# Altium PCB HV_Board_2022.PcbDoc
Units mil, origin at the board's own origin, x right, y up, seen from the top; angles counter-clockwise.
Board outline 7874.02 x 2952.76 mil, 2 copper layers (Top Layer, Bottom Layer), stack 13.42 mil thick; 32 components, 23 nets, 135 pads, 1 vias.
Unrouted connection lines stored in the file: 20.
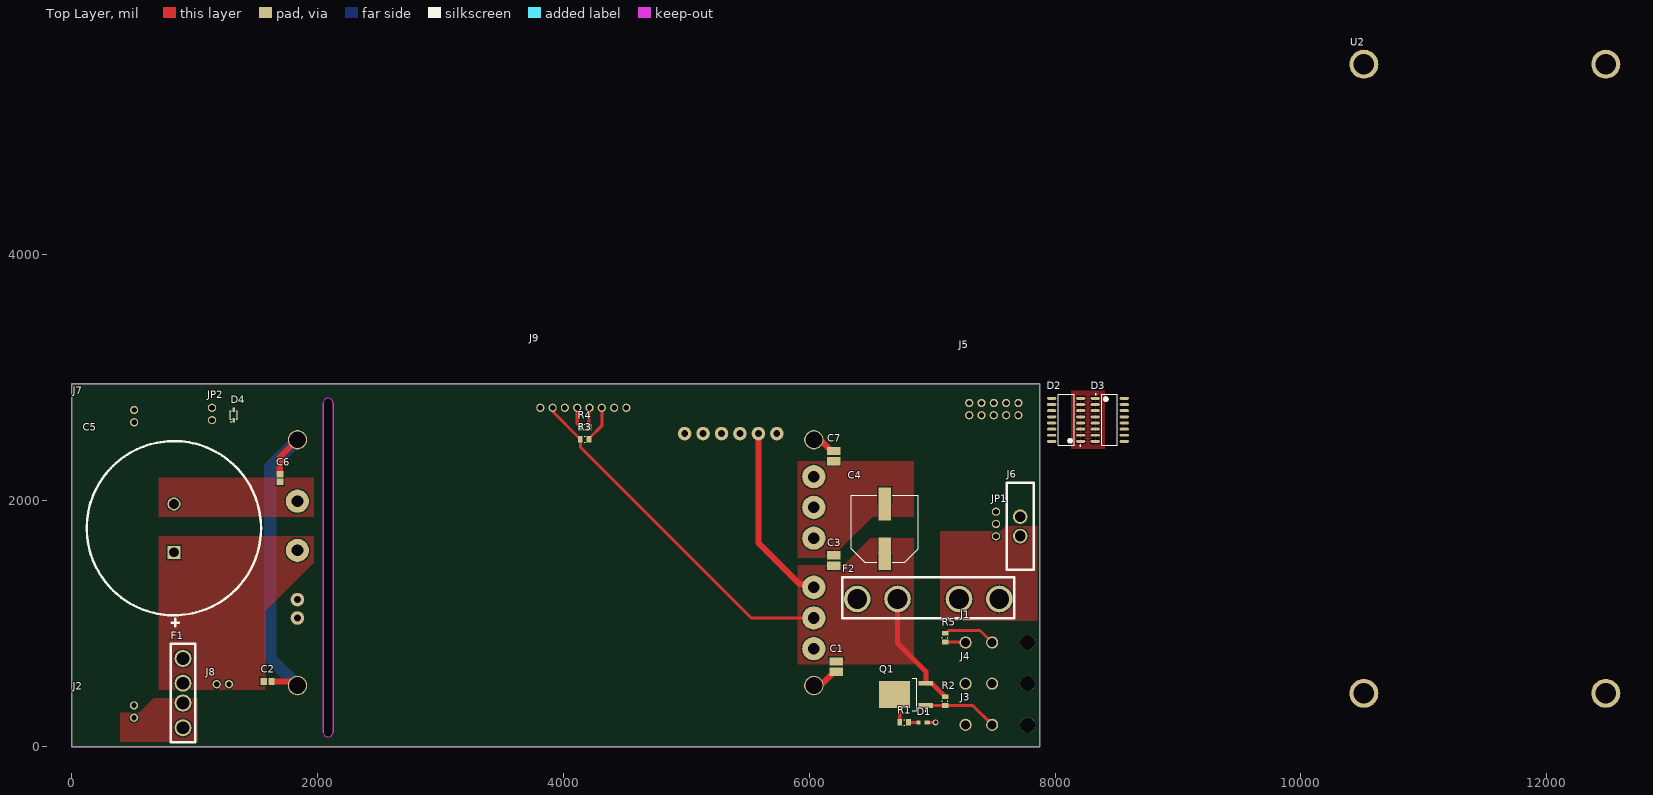
[diagram p0: Top Layer view]
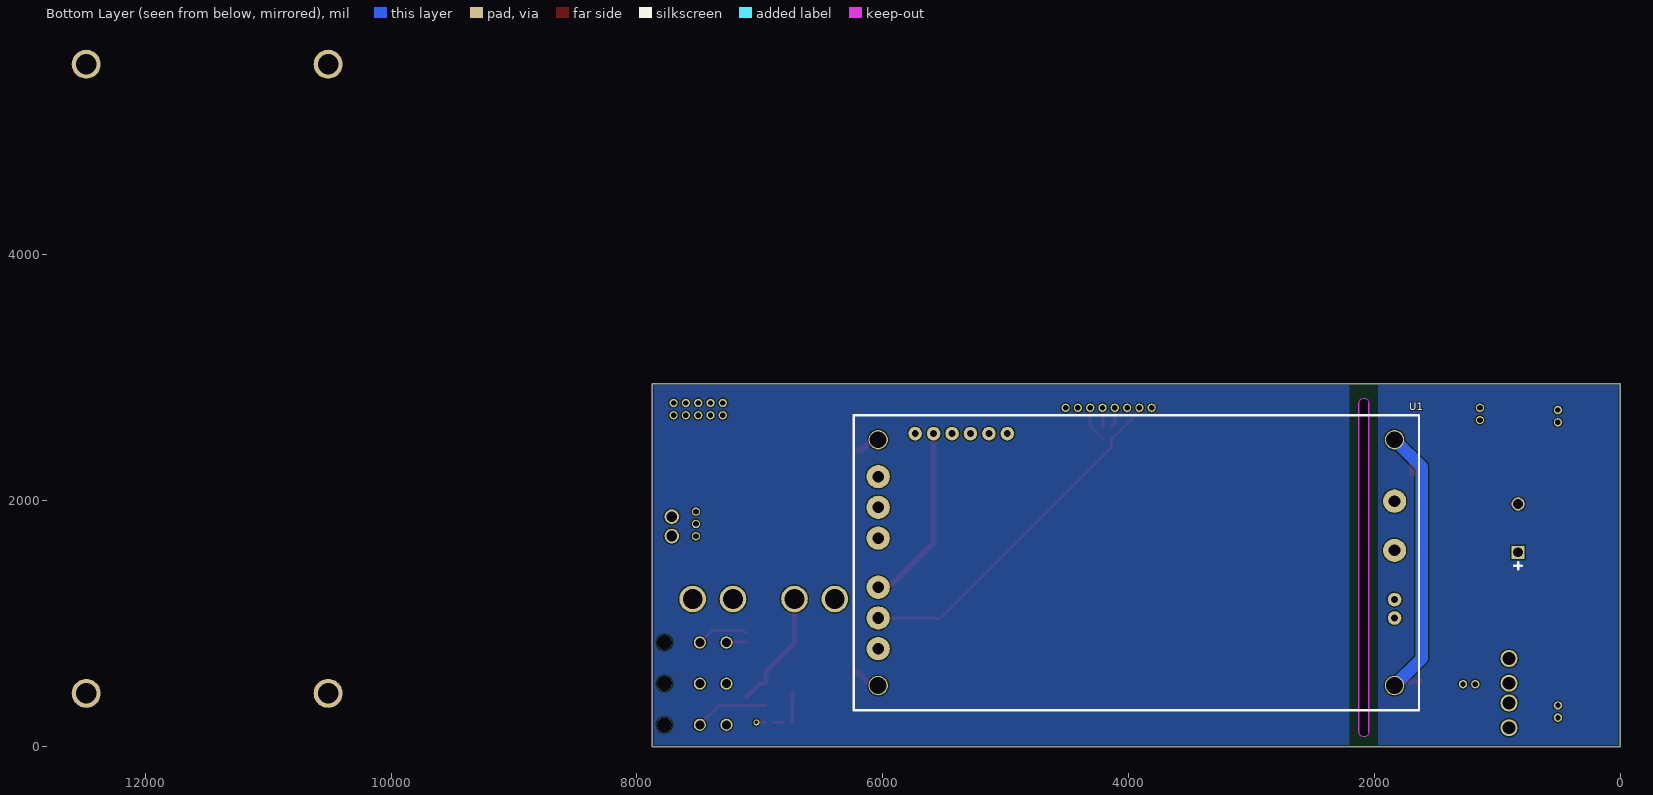
[diagram p1: Bottom Layer view, seen from below]

## Layer stack, top to bottom
Top Solder: solder mask 0.4, Solder Resist, Dk 3.5
Top Layer: signal copper 2
Dielectric 1: core 10, FR-4, Dk 4.2
Bottom Layer: signal copper 1.4201
Bottom Solder: solder mask 0.4, Solder Resist, Dk 3.5

## Board outline
0,0 7874.02,0 7874.02,2952.76 0,2952.76
cut-out: 2047.24,118.11 ccw(c2086.61,118.11) 2125.98,118.11 2125.98,2795.28 ccw(c2086.61,2795.28) 2047.24,2795.28

## Design rules (kind name [scope] priority, off if disabled: settings)
Clearance [All] p1: gap=10 ignorepadtopadclearanceinfootprint=FALSE except(0: Arc-Hole Track-Hole SMDPad-Hole THPad-Hole Via-Hole Fill-Hole Poly-Hole Region-Hole Text-Hole)
PolygonConnect [All] p1: connectstyle=Relief reliefconductorwidth=10 reliefentries=4 polygonreliefangle="90 Angle" airgapwidth=10
RoutingVias [All] p1: holewidth=28 width=50 viastyle="Through Hole" minholewidth=28 minwidth=50 maxholewidth=28 maxwidth=50
SolderMaskExpansion [All] p1: expansion=4 istentingtop=FALSE
Width [All] p1: maxlimit=100 minlimit=10 preferedwidth=10 minimp=50.000000 maximp=50.000000 favimp=50.000000
30 further rules are at their usual default settings.

## Classes and differential pairs
component class IMD: J7 J8 J9 R3 R4 R5 U2
component class Connectors_and_Protection: D1 D2 D3 D4 F1 F2 J1 J2 J3 J4 J5 J6 JP1 JP2 Q1 R1 R2
component class HV_to_LV_Power_Supply: * C1 C2 C3 C4 C5 C6 C7 U1

## Components (designator, comment, footprint, x,y, rotation, side; value= is the part's Value field where it differs from the comment)
C1 "0.22uF-450V" CAPC3025X28N 6220.47,649.61 r90 top
C2 "2200pF" CAP-0805 1594.49,530.67 r180 top
C3 "1uF" CAPC3025X28N 6200.79,1513.62 r270 top
C4 "1mF" CAPAE146136X170M 6614.17,1771.65 r90 top
C5 "330uF 450V" "AEC 380LQ331M450A022" 831.77,1973.5 r270 top
C6 "2200pF" CAP-0805 1692.91,2185.04 r270 top
C7 "0.22uF-450V" CAPC3025X28N 6200.79,2362.2 r270 top
D1 "Green" LED-0603 6968.5,228.35 r180 top
D2 "12V" 16-SO 8090.55,2657.48 r180 top
D3 "3.3V" 16-SO 8444.88,2657.48 r0 top
D4 "5V" DIODE-SOD323 1318.9,2696.85 r90 top
F1 "36-3522-2-ND" "Fuse Holder - 500V - 20A" 905.51,435.04 r90 top
F2 "36-3555-2-ND" "Fuse Holder - 500V - 50A" 6968.5,1200.79 r180 top
J1 "0768250002" 2X1PIN 7271.65,846.46 r90 top
J2 "WM4153-ND" 2PIN 507.44,334.65 r270 top
J3 "0768250002" 2X1PIN 7271.65,177.17 r90 top
J4 "0768250002" 2X1PIN 7271.65,511.81 r90 top
J5 "WM8263-ND" 2X5PIN 7701.57,2795.28 r180 top
J6 "952-2900-ND" 2Pin-POWER 7716.54,1791.34 r90 top
J7 "WM4153-ND" 2PIN 507.7,2737.8 r270 top
J8 "WM4153-ND" 2PIN 1179.53,507.44 r0 top
J9 "23-0705530112-ND" 8PIN 4512.6,2755.91 r180 top
JP1 "732-5316-ND" 3PIN-JP 7519.69,1711.02 r90 top
JP2 "732-5315-ND" 2PIN-JP 1141.73,2755.91 r270 top
Q1 "NTD2955T4GOSCT-ND" DPAK-TO252 6787.4,424.8 r180 top
R1 "2.2K" RES-0805 6771.65,196.85 r0 top
R2 "100K" RES-0805 7106.3,370.08 r270 top
R3 "2.2K" RES-0805 4173.23,2500 r180 top
R4 "2.2K" RES-0805 4173.23,2598.43 r0 top
R5 "2.2K" RES-0805 7106.3,885.83 r90 top
U1 "400V-12V BUCK-62.5A" CFB750-300S12 3937.01,1496.06 r0 bottom
U2 "ir155-3402" "IMD-Bender ir155 3204" 11496.06,2992.13 r90 top

## Footprints (in the part's own frame and the unit in brackets; to place one, negate y for a bottom-side part, rotate by r counter-clockwise, add the part's x,y. Pads: shape width x height; smd on the part's side, far side on the other; paste and mask are expansions set on the pad)
2PIN [mm]
  round 1.7 hole 1.11: 1(0,0) 2(2.54,0)
  body extent -2.48,-12.89 4.88,0.7, height 7.06
2PIN-JP [mm]
  round 1.7 hole 1.15: 1(0,0) 2(2.54,0)
  body extent -1.24,-1.27 3.84,1.27, height 8.57
2Pin-POWER [mm]
  round 3 hole 2.2: 1(-2,0) 2(2,0)
  silkscreen extent -9,-2.8 9,2.8, body extent -9,-3.27 9,2.78, height 5.6
2X1PIN [mm]
  round 2.5 hole 1.85: 1(0,0) 2(0,-5.5)
  round 3.1 hole 3.1: 3(0,-12.8)
  body extent -4.15,-21.4 4.2,0.56, height 14.55
2X5PIN [mm]
  round 1.7 hole 1.11: 1(0,0) 2(2.54,0) 3(5.08,0) 4(7.62,0) 5(10.16,0) 6(10.16,2.54) 7(7.62,2.54) 8(5.08,2.54) 9(2.54,2.54) 10(0,2.54)
  body extent -2.42,-10.55 12.62,2.85, height 9.87
3PIN-JP [mm]
  round 1.7 hole 1.15: 1(0,0) 2(2.54,0) 3(5.08,0)
  body extent -1.31,-1.27 6.31,1.27, height 8.57
8PIN [mm]
  round 1.7 hole 1.11: 1(0,0) 2(2.54,0) 3(5.08,0) 4(7.62,0) 5(10.16,0) 6(12.7,0) 7(15.24,0) 8(17.78,0)
  body extent -2.56,-12.89 20.3,0.7, height 7.06
16-SO [mm]
  oval 1.9x0.6 smd: 1(-3,4.445) 2(-3,3.175) 3(-3,1.905) 4(-3,0.635) 5(-3,-0.635) 6(-3,-1.905) 7(-3,-3.175) 8(-3,-4.445) 9(3,-4.445) 10(3,-3.175) 11(3,-1.905) 12(3,-0.635) 13(3,0.635) 14(3,1.905) 15(3,3.175) 16(3,4.445)
  silkscreen extent -3.03,-5.25 1.6,5.42
"AEC 380LQ331M450A022" [mm]
  rect 2.7x2.7 hole 2: 1(10,0)
  round 2.7 hole 2: 2(0,0)
  silkscreen extent -13,-18 25.25,18, body extent -12.5,-17.5 22.5,17.5, height 30
CAP-0805 [mm] "Chip Capacitor, 2-Leads, Body 2.00x1.25mm, IPC Medium Density"
  rect 1.3x1.45 smd: 1(-0.8,0) 2(0.8,0)
  body extent -1.1,-0.72 1.1,0.72, height 1.35
CAPAE146136X170M [mm] "Aluminum Electrolytic Capacitor, Body 13.60x13.60x17.00mm, IPC Low Density"
  rect 6.75x2.6 smd: 1(-5.125,0) 2(5.125,0)
  silkscreen extent -6.9,-6.9 6.9,6.9, body extent -6.9,-6.9 6.9,6.9, height 17
CAPC3025X28N [mm] "Chip Capacitor, 2-Leads, Body 3.00x2.50mm, IPC Medium Density"
  rect 1.75x2.8 smd: 1(-1.075,0) 2(1.075,0)
  body extent -1.6,-1.4 1.6,1.4, height 2.8
CFB750-300S12 [mm] "Cincon CFB750-300S12 DC-DC Converter"
  round 4.8 hole 2.4: 1(-53.35,-12.7) 2(-53.35,-2.54) 5(53.35,17.78) 6(53.35,11.43) 7(53.35,5.08) 8(53.35,-5.08) 9(53.35,-11.43) 10(53.35,-17.78)
  round 2.8 hole 1.4: 3(-53.35,7.62) 4(-53.35,11.43) 11(45.71,-26.67) 12(41.9,-26.67) 13(38.09,-26.67) 14(34.28,-26.67) 15(30.47,-26.67) 16(26.66,-26.67)
  round 4 hole 3.5: C_HV(-53.35,-25.4) C_HV(-53.35,25.4) C_LV_+12(53.35,25.4) C_LV_GND(53.35,-25.4)
  silkscreen extent -58.4,-30.5 58.4,30.5, body extent -58.4,-30.5 58.4,30.5, height 12.7
DIODE-SOD323 [mm] "SODFL, 2-Leads, Body 1.25x2.50mm, IPC Medium Density"
  rect 0.9x0.5 smd: 1(-1.1,0) 2(1.1,0)
  silkscreen extent -1.5,-0.7 0.9,0.7, body extent -1.25,-0.67 1.25,0.67, height 1.1
DPAK-TO252 [mm] "D-PAK, 3-Pads, Body 6.20x6.73mm (max), IPC Medium Density"
  rect 3x1 smd: 1(-4.1,2.29) 3(-4.1,-2.29)
  rect 6.4x5.55 smd: 2(2.35,0)
  silkscreen extent -4.23,-3.35 -1.25,3.46, body extent -4.57,-3.37 5.33,3.37, height 2.38
"Fuse Holder - 500V - 20A" [mm]
  round 3.5 hole 2.6: 1(-7.15,0) 1(-2.05,0) 2(2.05,0) 2(7.15,0)
  silkscreen extent -10.16,-2.54 10.16,2.54, body extent -9.65,-2.22 9.65,2.22, height 7.62
"Fuse Holder - 500V - 50A" [mm]
  round 5.5 hole 4.05: 1(-14.7,0) 1(-6.35,0) 2(6.35,0) 2(14.7,0)
  silkscreen extent -17.78,-4.5 17.78,4, body extent -17.9,-3.92 17.91,1.92, height 11.22
"IMD-Bender ir155 3204" [mm]
  round 6 hole 4.2: 1(-65,-25) 1(-65,25) 1(65,-25) 1(65,25)
LED-0603 [mm]
  rect 0.8x0.8 smd: 1(2,0.8) 2(0.4,0.8)
  silkscreen extent -0.18,0.43 -0.18,1.17, body extent 0.4,0.4 2,1.2, height 0.7
RES-0805 [mm] "Chip Resistor, 2-Leads, Body 2.00x1.25mm, IPC Medium Density"
  rect 1x1.35 smd: 1(-0.9,0) 2(0.9,0)
  silkscreen extent -0.1,-0.58 0.1,0.58, body extent -1.05,-0.67 1.05,0.67, height 0.6

## Part data
C1 C7: library part 0.22uF-450V-1210, "CAP CER 0.22UF 450V X7T 1210", Capacitance=220nF, Case Code (Imperial)=1210, Case Code (Metric)=3225, Dielectric=X7T, Manufacturer=TDK, Manufacturer Part Number=C3225X7T2W224K200AE, Max Operating Temperature=125°C, Min Operating Temperature=-55°C, Package Quantity=1000, Resistor Type=Ceramic, Supplier Part Number 1=445-8909-1-ND, Tolerance=10%, Voltage Rating=450V, Case/Package=1210, Category="Ceramic Capacitors", ComponentLink1Description=https://datasheet.ciiva.com/24219/c3225x7t2w224k200ae-265393-24219702.pdf?src-supplier=Mouser, ComponentLink1URL=https://datasheet.ciiva.com/24219/c3225x7t2w224k200ae-265393-24219702.pdf?src-supplier=Mouser, Depth=2.5mm, Features="Soft Termination", Height=2mm, Length=3.2mm, Mount="Surface Mount", Packaging="Tape and Reel", Pricing 1="1=0.90000, 10=0.66200, 50=0.52980, 100=0.45410, 500=0.35948 (USD)", RoHS=Yes, RoHS Compliant=Yes, Series=C, Stock 1=22849, Supplier 1=Digi-Key, Termination=SMD/SMT, Thickness=0.098inch, Voltage Rating (DC)=450V, Weight=0.000564oz, Width=2.5mm
C2 C6: library part 2200pF-450V-0805, "Cap Ceramic 0.0022uF 450V C0G 5% Pad SMD 0805 Soft Termination 125C Automotive T/R CGA4F4C0G2W222J085AE", Manufacturer=TDK, Manufacturer Part Number=CGA4F4C0G2W222J085AE, Supplier Part Number 1=445-175690-1-ND, Category="Ceramic Capacitors", Pricing 1="1=0.51000, 10=0.35600, 50=0.24940, 100=0.21380, 500=0.16038, 1000=0.13543 (USD)", RoHS=Yes, RoHS Compliant=Yes, Stock 1=9544, Supplier 1=Digi-Key
C3: library part 1uF-50V-1210, "CAP CER 1UF 50V X7R 1210 CL32B105KBHNNNE", Case Code (Imperial)=1210, Case Code (Metric)=3225, Dielectric=X7R, Manufacturer=Samsung, Manufacturer Part Number=CL32B105KBHNNNE, Max Operating Temperature=125°C, Min Operating Temperature=-55°C, Package Quantity=1, Supplier Part Number 1=1276-1811-1-ND, Tolerance=10%, Voltage=50V, Capacitance=1uF, Case/Package=1210, Category="Ceramic Capacitors", ComponentLink1Description=https://datasheet.ciiva.com/15196/getdatasheetpartid-355242-15196145.pdf?src-supplier=Verical, ComponentLink1URL=https://datasheet.ciiva.com/15196/getdatasheetpartid-355242-15196145.pdf?src-supplier=Verical, ComponentLink2Description=https://datasheet.ciiva.com/29202/451199-da-01-en-vs-kondensator-1210-29202487.pdf?src-supplier=Conrad, ComponentLink2URL=https://datasheet.ciiva.com/29202/451199-da-01-en-vs-kondensator-1210-29202487.pdf?src-supplier=Conrad, ComponentLink3Description=https://datasheet.ciiva.com/16369/cl05b104kq5nnnc-16369702.pdf?src-supplier=Future+Electronics, ComponentLink3URL=https://datasheet.ciiva.com/16369/cl05b104kq5nnnc-16369702.pdf?src-supplier=Future+Electronics, Construction=Flat, Depth=2.5mm, Height=1.6mm, Length=3.2mm, Material=Ceramic, Mount="Surface Mount", Packaging="Tape and Reel", Pricing 1="1=0.26000, 10=0.17800, 50=0.11900, 100=0.10110, 500=0.07134, 1000=0.06243 (USD)", Radiation Hardening=No, RoHS=Yes, RoHS Compliant=Yes, Series=CL, Stock 1=27840, Supplier 1=Digi-Key, Thickness=0.071inch, Voltage Rating=50V, Width=0.098inch
C4: library part AEC-1mF-25V, "CAP ALUM 1000UF 20% 25V SMD UUG1E102MNQ1MS", Case/Package=Radial, Leakage Current=10uA, Manufacturer=Nichicon, Manufacturer Part Number=UUG1E102MNQ1MS, Max Operating Temperature=85°C, Min Operating Temperature=-40°C, Package Quantity=1, Ripple Current=820mA, Supplier Part Number 1=493-7421-1-ND, Tolerance=20%, Voltage Rating=25V, Capacitance=1mF, Category="Aluminum Electrolytic Capacitors", ComponentLink1Description=https://datasheet.ciiva.com/6311/e-ug-6311782.pdf?src-supplier=Digi-Key, ComponentLink1URL=https://datasheet.ciiva.com/6311/e-ug-6311782.pdf?src-supplier=Digi-Key, ComponentLink2Description=https://datasheet.ciiva.com/6311/e-ug-6311783.pdf?src-supplier=Digi-Key, ComponentLink2URL=https://datasheet.ciiva.com/6311/e-ug-6311783.pdf?src-supplier=Digi-Key, Diameter=12.5mm, Dissipation Factor=0.16%, Height=16mm, Height - Seated (Max)=0.669inch, Lead Free="Contains Lead", Length=16mm, Life (Hours)=2000Hour, Mount="Surface Mount", Packaging="Tape and Reel", Pricing 1="1=1.53000, 10=1.20500, 50=1.04480 (USD)", REACH SVHC="No SVHC", Ripple Current (AC)=820mA, RoHS=Yes, RoHS Compliant=Yes, Series=UG, Stock 1=77, Supplier 1=Digi-Key, Termination=SMD/SMT, Voltage Rating (DC)=25V
C5: library part AEC-330uF-450V, "Aluminum Electrolytic Capacitors - Snap In 330uF 450V 20% 380LQ331M450A022", Capacitance=330uF, Case/Package=Radial, Dielectric Material=Aluminium, ESR (Equivalent Series Resistance)=603mR, Manufacturer="Cornell Dubilier", Manufacturer Part Number=380LQ331M450A022, Max Operating Temperature=85°C, Min Operating Temperature=-25°C, Package Quantity=40, Ripple Current=2.01A, Tolerance=20%, Voltage Rating=450V, Category="Aluminum Electrolytic Capacitors", ComponentLink1Description=https://datasheet.ciiva.com/5372/380lq-5372414.pdf?src-supplier=Mouser, ComponentLink1URL=https://datasheet.ciiva.com/5372/380lq-5372414.pdf?src-supplier=Mouser, Diameter=35mm, Features="General Purpose", Height=30mm, Height - Seated (Max)=1.181inch, Lead Free="Lead Free", Lead Pitch=10mm, Length=30mm, Life (Hours)=2000Hour, Mount="Through Hole", Number of Pins=2, Packaging=Bulk, Pricing 1="1=6.30000, 10=5.67000, 50=4.91400, 100=4.28400, 500=3.52800, 1000=3.27600, 2500=3.21300, 5000=3.19200 (USD)", REACH SVHC=Unknown, RoHS=Yes, RoHS Compliant=Yes, Series=380LQ, Stock 1=2991, Supplier 1=Digi-Key, Termination="Snap in", Voltage Rating (DC)=450V, Weight=1.69315oz
D1: library part LED-Green, "LED GREEN CLEAR 0603 SMD", Case Code (Imperial)=0603, Case Code (Metric)=1608, Forward Current=30mA, Forward Voltage=2V, Manufacturer="Wurth Electronics", Manufacturer Part Number=150060VS75000, Max Operating Temperature=85°C, Min Operating Temperature=-40°C, Package Quantity=1, Supplier Part Number 1=732-4980-1-ND, Test Current=20mA, Case/Package=0603, Color=Green, ComponentLink1Description=https://katalog.we-online.de/led/datasheet/150060VS75000.pdf?src-supplier=Digi-Key, ComponentLink1URL=https://katalog.we-online.de/led/datasheet/150060VS75000.pdf?src-supplier=Digi-Key, Dominant Wavelength=570nm, Height=0.7mm, Length=1.6mm, Lens Style=Clear,Rectangular, Luminous Intensity=40mcd, Mount="Surface Mount", Number of Pins=2, Packaging="Tape and Reel", Pricing 1="1=0.14, 50=0.133, 100=0.114, 500=0.099 (USD)", REACH SVHC=Unknown, Stock 1=118118, Supplier 1=Digi-Key, Viewing Angle=140°, Wavelength=570nm, Width=0.8mm
D2: library part TVS-12V-X8, "PD 300W VWM 12VCJ 25PFPACKAGE SO", Supplier Part Number 1=1655-2159-1-ND, Supplier 1=Digi-Key
D3: library part TVS-3.3V-X8, "PD 300W VWM 3.3VCJ 25PFPACKAGE S", Supplier Part Number 1=1655-2157-1-ND, Supplier 1=Digi-Key
D4: library part TVS-5V, "TVS DIODE 5V SOD323", Manufacturer=Nexperia, Manufacturer Part Number=PESD5V0U1UA,115, Supplier Part Number 1=1727-4155-6-ND, ComponentLink1Description=https://assets.nexperia.com/documents/data-sheet/PESD5V0U1UA_UB_UL.pdf?src-supplier=Digi-Key, ComponentLink1URL=https://assets.nexperia.com/documents/data-sheet/PESD5V0U1UA_UB_UL.pdf?src-supplier=Digi-Key, ComponentLink2Description=http://www.farnell.com/datasheets/453996.pdf?src-supplier=Farnell, ComponentLink2URL=http://www.farnell.com/datasheets/453996.pdf?src-supplier=Farnell, Pricing 1="1=0.43, 10=0.32, 25=0.28, 100=0.152, 250=0.1512, 500=0.124, 1000=0.092 (USD)", Stock 1=127058, Supplier 1=Digi-Key
F1: library part "Fuse Holder - 500V - 20A", "FUSE CLIP BLADE 500V 20A PCB", Supplier 1=Digi-Key
F2: library part "Fuse Holder - 500V - 50A", "FUSE BLOCK BLADE 500V 50A PCB", Supplier 1=Digi-Key
J1 J3 J4: library part 2X1PIN, "CONN HEADER R/A 2POS", Color=Black, Manufacturer=Molex, Manufacturer Part Number=76825-0002, Supplier Part Number 1=WM11969-ND, ComponentLink1Description=http://www.farnell.com/datasheets/1968956.pdf?src-supplier=Element14, ComponentLink1URL=http://www.farnell.com/datasheets/1968956.pdf?src-supplier=Element14, ComponentLink2Description=http://www.farnell.com/datasheets/2216551.pdf?src-supplier=Newark, ComponentLink2URL=http://www.farnell.com/datasheets/2216551.pdf?src-supplier=Newark, ComponentLink3Description=http://www.farnell.com/datasheets/2216551.pdf?src-supplier=Farnell, ComponentLink3URL=http://www.farnell.com/datasheets/2216551.pdf?src-supplier=Farnell, ComponentLink4Description=https://www.molex.com/pdm_docs/sd/768250002_sd.pdf?src-supplier=Digi-Key, ComponentLink4URL=https://www.molex.com/pdm_docs/sd/768250002_sd.pdf?src-supplier=Digi-Key, ComponentLink5Description=http://www.farnell.com/datasheets/2001779.pdf?src-supplier=Element14, ComponentLink5URL=http://www.farnell.com/datasheets/2001779.pdf?src-supplier=Element14, ComponentLink6Description=http://www.alliedelec.com/images/products/datasheets/bm/BrandonData/70717238.pdf?src-supplier=Allied+Electronics, ComponentLink6URL=http://www.alliedelec.com/images/products/datasheets/bm/BrandonData/70717238.pdf?src-supplier=Allied+Electronics, Contact Material=Copper, Contact Plating=Tin, Gender=Male, Number of Circuits=2, Number of Contacts=2, Number of Rows=2, Orientation="Right Angle", Pitch=5.7mm, Pricing 1="1=1.13, 10=0.993, 25=0.9344, 50=0.8956, 100=0.8567, 250=0.7788, 500=0.70092, 1000=0.62304, 2500=0.56463 (USD)", REACH SVHC=Unknown, Stock 1=0, Supplier 1=Digi-Key, Termination="Through Hole"
J2 J7 J8: library part 2PIN, "CONN HEADER R/A 2POS 2.54MM", Color=Black, Contact Resistance=30mR, Manufacturer=Molex, Manufacturer Part Number=0705530106, Max Operating Temperature=105°C, Min Operating Temperature=-40°C, ComponentLink1Description=http://www.molex.com/webdocs/datasheets/pdf/en-us/0705530106_PCB_HEADERS.pdf?src-supplier=Avnet+Asia, ComponentLink1URL=http://www.molex.com/webdocs/datasheets/pdf/en-us/0705530106_PCB_HEADERS.pdf?src-supplier=Avnet+Asia, ComponentLink2Description=https://www.molex.com/pdm_docs/ps/PS-70400.pdf?src-supplier=Digi-Key, ComponentLink2URL=https://www.molex.com/pdm_docs/ps/PS-70400.pdf?src-supplier=Digi-Key, Connector Type="Male Pin", Contact Material=Bronze, Contact Mating Length=0.24inch, Contact Plating=Gold, Depth=13.59mm, Housing Color=Black, Housing Material=Polyester, Length=7.37mm, Mount="Through Hole", Number of Contacts=2, Number of Positions=2, Number of Rows=1, Orientation="Right Angle", Packaging=Rail/Tube, Pitch=2.54mm, Pricing 1="1=1.38, 10=1.25, 100=1.071, 500=0.8925, 1000=0.765, 5000=0.6783, 10000=0.663 (USD)", Stock 1=2224, Supplier 1=Digi-Key, Supplier Part Number 1=WM4153-ND, Termination=Solder
J5: library part 2X5PIN, "CONN HEADER R/A 10POS 2.54MM", Color=Black, Current Rating=3A, Flammability Rating="UL94 V-0", Manufacturer=Molex, Manufacturer Part Number=90130-3110, Max Operating Temperature=125°C, Max Voltage Rating (AC)=350V, Max Voltage Rating (DC)=350.35kV, Min Operating Temperature=-55°C, Package Quantity=1, ComponentLink1Description=http://www.mouser.com/ds/2/276/0901303110_PCB_HEADERS-151522.pdf?src-supplier=Mouser, ComponentLink1URL=http://www.mouser.com/ds/2/276/0901303110_PCB_HEADERS-151522.pdf?src-supplier=Mouser, ComponentLink2Description=http://uk.rs-online.com/webdocs/13c4/0900766b813c4c8e.pdf?src-supplier=RSComponents, ComponentLink2URL=http://uk.rs-online.com/webdocs/13c4/0900766b813c4c8e.pdf?src-supplier=RSComponents, ComponentLink3Description=http://www.molex.com/webdocs/datasheets/pdf/en-us/0901303110_PCB_HEADERS.pdf?src-supplier=Avnet, ComponentLink3URL=http://www.molex.com/webdocs/datasheets/pdf/en-us/0901303110_PCB_HEADERS.pdf?src-supplier=Avnet, ComponentLink4Description=http://www.molex.com/pdm_docs/sd/901303110_sd.pdf?src-supplier=Digi-Key, ComponentLink4URL=http://www.molex.com/pdm_docs/sd/901303110_sd.pdf?src-supplier=Digi-Key, ComponentLink5Description=http://www.molex.com/webdocs/datasheets/pdf/en-us/0901303110_PCB_HEADERS.pdf?src-supplier=Avnet+Europe, ComponentLink5URL=http://www.molex.com/webdocs/datasheets/pdf/en-us/0901303110_PCB_HEADERS.pdf?src-supplier=Avnet+Europe, Connector Type="Male Pin", Contact Material=Brass, Contact Mating Length=0.266inch, Contact Plating=Tin,Lead, Depth=9.75mm, Gender=Male, Glow Wire Compliant=Non-compliant, Housing Color=Black, Housing Material=Polyester, Lead Free="Lead Free", Length=15.42mm, Mount="Through Hole", Number of Circuits=10, Number of Contacts=10, Number of Positions=10, Number of Rows=2, Orientation="Right Angle", Packaging=Tray, Pitch=2.54mm, Pricing 1="1=1.47, 10=1.329, 100=1.1395, 500=0.94956, 1000=0.8139, 5000=0.72166, 10000=0.70538 (USD)", Radiation Hardening=No, REACH SVHC="No SVHC", Row Spacing=0.1inch, Stock 1=3596, Supplier 1=Digi-Key, Supplier Part Number 1=WM8263-ND, Termination=Solder, Voltage Rating=350V, Voltage Rating (DC)=350V
J6: library part 2PIN-POWER, "CONN HEADER VERT 2POS 4MM 800V 40A", Supplier 1=Digi-Key, Supplier Part Number 1=952-2900-ND
J9: library part 8PIN, "CONN HEADER R/A 8POS 2.54MM", Color=Black, Contact Resistance=30mR, Current Rating=3A, Flammability Rating="UL94 V-0", Insulation Resistance=1GR, Manufacturer=Molex, Manufacturer Part Number=70553-0112, Max Operating Temperature=105°C, Min Operating Temperature=-40°C, Package Quantity=1, Voltage Rating=250V, ComponentLink1Description=https://www.molex.com/pdm_docs/ps/PS-70400.pdf?src-supplier=Digi-Key, ComponentLink1URL=https://www.molex.com/pdm_docs/ps/PS-70400.pdf?src-supplier=Digi-Key, ComponentLink2Description=http://www.mouser.com/ds/2/276/0705530112_PCB_HEADERS-172840.pdf?src-supplier=Mouser, ComponentLink2URL=http://www.mouser.com/ds/2/276/0705530112_PCB_HEADERS-172840.pdf?src-supplier=Mouser, Connector Type="Male Pin", Contact Material=Bronze, Contact Mating Length=0.24inch, Contact Plating=Gold, ELV=Compliant, Glow Wire Compliant=Non-compliant, Housing Material=Thermoplastic, Material=Brass, Mount="Through Hole", Number of Circuits=8, Number of Contacts=8, Number of Positions=8, Number of Rows=1, Orientation="Right Angle", Packaging=Rail/Tube, Pitch=2.54mm, Pricing 1="1=2.43, 10=2.205, 100=1.89, 500=1.575, 1000=1.35, 5000=1.197, 10000=1.17 (USD)", Stock 1=1363, Supplier 1=Digi-Key, Supplier Part Number 1=23-0705530112-ND, Termination=Solder, Voltage Rating (DC)=250V
JP1: library part 3PIN-TEST, "CONN HEADER VERT 3POS 2.54MM"
JP2: library part 2PIN-TEST, "CONN HEADER VERT 2POS 2.54MM"
Q1: library part P-FET-60V-12A, "MOSFET P-CH 60V 12A DPAK", Case/Package=DPAK, Continuous Drain Current (ID)=12A, Current Rating=-12A, Drain to Source Breakdown Voltage=-60V, Drain to Source Resistance=155mR, Gate to Source Voltage (Vgs)=20V, Input Capacitance=750pF, Manufacturer="ON Semiconductor", Manufacturer Part Number=NTD2955T4G, Max Operating Temperature=175°C, Max Power Dissipation=55W, Min Operating Temperature=-55°C, On-State Resistance=180mR, Package Quantity=1, Supplier Part Number 1=NTD2955T4GOSDKR-ND, Threshold Voltage=-2.8V, ComponentLink1Description=http://www.onsemi.com/pub/Collateral/NTD2955-D.PDF?src-supplier=Avnet, ComponentLink1URL=http://www.onsemi.com/pub/Collateral/NTD2955-D.PDF?src-supplier=Avnet, ComponentLink2Description=http://www.onsemi.com/pub/Collateral/NTD2955-D.PDF?src-supplier=Avnet+Europe, ComponentLink2URL=http://www.onsemi.com/pub/Collateral/NTD2955-D.PDF?src-supplier=Avnet+Europe, ComponentLink3Description=http://www.onsemi.com/pub_link/Collateral/NTD2955-D.PDF?src-supplier=Element14, ComponentLink3URL=http://www.onsemi.com/pub_link/Collateral/NTD2955-D.PDF?src-supplier=Element14, ComponentLink4Description=http://www.onsemi.com/pub/Collateral/NTD2955-D.PDF?src-supplier=Digi-Key, ComponentLink4URL=http://www.onsemi.com/pub/Collateral/NTD2955-D.PDF?src-supplier=Digi-Key, ComponentLink5Description=http://www.jameco.com/Jameco/Products/ProdDS/1178118.pdf?src-supplier=Jameco, ComponentLink5URL=http://www.jameco.com/Jameco/Products/ProdDS/1178118.pdf?src-supplier=Jameco, Contact Plating=Tin,Matte, Drain to Source Voltage (Vdss)=-60V, Element Configuration=Single, Fall Time=48ns, Height=2.38mm, Lead Free="Lead Free", Length=6.73mm, Nominal Vgs=-2.8V, Number of Channels=1, Number of Elements=1, Number of Pins=3, Packaging="Tape and Reel", Power Dissipation=55W, Pricing 1="1=0.76, 10=0.672, 25=0.6316, 100=0.4583, 250=0.44204, 500=0.38296, 1000=0.32592 (USD)", Radiation Hardening=No, Rds On Max=180mR, REACH SVHC="No SVHC", Rise Time=45ns, Stock 1=9993, Supplier 1=Digi-Key, Turn-Off Delay Time=26ns, Turn-On Delay Time=10ns, Voltage Rating (DC)=-60V, Width=6.22mm
R1 R3 R4 R5: library part 0805-2.2KR, "RES SMD 2.2K OHM 1% 1/8W 0805", Case Code (Imperial)=0805, Case Code (Metric)=2012, Manufacturer=Yageo, Manufacturer Part Number=RC0805FR-072K2L, Max Operating Temperature=155°C, Max Power Dissipation=125mW, Min Operating Temperature=-55°C, Package Quantity=1, Resistance=2.2kR, Supplier Part Number 1=311-2.20KCRDKR-ND, Temperature Coefficient=100ppm/°C, Tolerance=1%, Voltage Rating=150V, Case/Package=0805, ComponentLink1Description=http://www.farnell.com/datasheets/38627.pdf?src-supplier=Element14, ComponentLink1URL=http://www.farnell.com/datasheets/38627.pdf?src-supplier=Element14, ComponentLink2Description=http://www.farnell.com/datasheets/444164.pdf?src-supplier=Element14, ComponentLink2URL=http://www.farnell.com/datasheets/444164.pdf?src-supplier=Element14, ComponentLink3Description=http://www.yageo.com/documents/recent/PYu-RC_Group_51_RoHS_L_9.pdf?src-supplier=Digi-Key, ComponentLink3URL=http://www.yageo.com/documents/recent/PYu-RC_Group_51_RoHS_L_9.pdf?src-supplier=Digi-Key, ComponentLink4Description=http://www.yageo.com/documents/recent/PYu-RC_Group_51_RoHS_L_10.pdf?src-supplier=Digi-Key, ComponentLink4URL=http://www.yageo.com/documents/recent/PYu-RC_Group_51_RoHS_L_10.pdf?src-supplier=Digi-Key, Composition="Thick Film", Depth=1.25mm, Features="Moisture Resistant", Height=0.5mm, Lead Free="Lead Free", Lead Pitch=0.4mm, Length=2mm, Military Standard=Not, Number of Pins=2, Number of Terminations=2, Packaging="Tape and Reel", Power Rating=125mW, Pricing 1="1=0.1, 10=0.04, 100=0.0163, 1000=0.00731, 2500=0.00635 (USD)", REACH SVHC=Unknown, Stock 1=4156138, Supplier 1=Digi-Key, Termination=SMD/SMT, Voltage Rating (DC)=150V, Width=1.25mm
R2: library part 0805-100KR, "RES SMD 100K OHM 1% 1/8W 0805", Case Code (Imperial)=0805, Case Code (Metric)=2012, Manufacturer=Yageo, Manufacturer Part Number=RC0805FR-07100KL, Max Operating Temperature=155°C, Max Power Dissipation=125mW, Min Operating Temperature=-55°C, Package Quantity=1, Resistance=100kR, Supplier Part Number 1=311-100KCRDKR-ND, Temperature Coefficient=100ppm/°C, Tolerance=1%, Voltage Rating=150V, Case/Package=0805, ComponentLink1Description=http://www.yageo.com/documents/recent/PYu-RC_Group_51_RoHS_L_10.pdf?src-supplier=Digi-Key, ComponentLink1URL=http://www.yageo.com/documents/recent/PYu-RC_Group_51_RoHS_L_10.pdf?src-supplier=Digi-Key, ComponentLink2Description=http://www.yageo.com/documents/recent/PYu-RC_Group_51_RoHS_L_9.pdf?src-supplier=Mouser, ComponentLink2URL=http://www.yageo.com/documents/recent/PYu-RC_Group_51_RoHS_L_9.pdf?src-supplier=Mouser, ComponentLink3Description=http://documents.rs-components.com/techlib://itc_doclist_GB.htm?stockno=6185113&src-supplier=RSComponents, ComponentLink3URL=http://documents.rs-components.com/techlib://itc_doclist_GB.htm?stockno=6185113&src-supplier=RSComponents, ComponentLink4Description=http://www.yageo.ru/pdf/RC0805.pdf?src-supplier=Future+Electronics, ComponentLink4URL=http://www.yageo.ru/pdf/RC0805.pdf?src-supplier=Future+Electronics, ComponentLink5Description=http://www.farnell.com/datasheets/38627.pdf?src-supplier=Element14, ComponentLink5URL=http://www.farnell.com/datasheets/38627.pdf?src-supplier=Element14, ComponentLink6Description=http://www.farnell.com/datasheets/2167052.pdf?src-supplier=Element14, ComponentLink6URL=http://www.farnell.com/datasheets/2167052.pdf?src-supplier=Element14, ComponentLink7Description=http://www.farnell.com/datasheets/1686128.pdf?src-supplier=Element14, ComponentLink7URL=http://www.farnell.com/datasheets/1686128.pdf?src-supplier=Element14, ComponentLink8Description=http://www.farnell.com/datasheets/444164.pdf?src-supplier=Element14, ComponentLink8URL=http://www.farnell.com/datasheets/444164.pdf?src-supplier=Element14, Composition="Thick Film", Depth=1.25mm, Features="Moisture Resistant", Height=0.024inch, Lead Free="Lead Free", Lead Pitch=0.4mm, Length=2mm, Military Standard=Not, Number of Pins=2, Number of Terminations=2, Packaging="Tape and Reel", Power Rating=125mW, Pricing 1="1=0.1, 10=0.04, 100=0.0163, 1000=0.00731, 2500=0.00635 (USD)", REACH SVHC=Unknown, Stock 1=5636840, Supplier 1=Digi-Key, Termination=SMD/SMT, Voltage Rating (DC)=150V, Width=0.049inch
U1: library part "Cincon CFB750-300S12", "750Watts Full Brick DC-DC Converter Input Voltage 200-425VDC to 12VDC, 62.5A"
U2: library part IMD-ir155-3402, "ISOMETER iso-F1 IR155-3204"

## Via types
v1: diameter 50, hole 28, Top Layer to Bottom Layer, 1 vias

## Nets (pads, with @x,y where several pads share a name; then routed paths per layer and width w, separated by ;. In a path a pad name is that pad's centre, name@x,y a point inside that pad or via, vN(x,y) a via of type N, cw(c..) or ccw(c..) an arc to the next point about the centre after c; other vN are vias at no path point)
+5V_HV: D4.1 JP2.2
+12V_Out: D2.14 F2.1 J6.1 JP1.1
D+3.3V: D3.16 JP1.2
D+12V: C1.2 C3.2 C4.1 F2.2 J9.7 Q1.3 R2.1 R3.2 U1.5 U1.6 U1.7 U1.12 | length 5372
  Top Layer w25: J9.7 3920.62,2747.88 3920.62,2717.17 4123.72,2514.07 4130.61,2514.07 4137.8,2506.89 R3.2@4137.8,2493.11 ; R3.2 4137.8,2437.01 5528.74,1046.06 U1.6
  Top Layer w40: F2.2@6718.5,1200.79 6718.5,840.55 6948.82,610.24 Q1.3 6996.85,514.96 R2.1
  Top Layer w50: U1.12 5586.61,1657.48 5922.87,1321.22 6012.24,1321.22 U1.7
"HV GND": C5.2 C6.2 D4.2 J2.1 J7.1 J7.2 JP2.1 U1.1
HV+IN: F1.1 J2.2
IMD-Fault: D2.10 J5.3
Interlock: D2.13 J3.2 Q1.1 R2.2 | length 604.6
  Top Layer w25: Q1.1 R2.2 7330.71,334.65 J3.2
"LV GND": C3.1 C4.2 C7.2 D1.2 D2.1 D2.2 D2.3 D2.4 D2.5 D2.6 D2.7 D2.8 D3.1 D3.2 D3.3 D3.4 D3.5 D3.6 D3.7 D3.8 J1.1 J3.1 J4.1 J5.1 J5.2 J5.9 J5.10 J6.2 J9.5 J9.6 J9.8 JP1.3 R4.1 R5.1 U1.8 U1.9 U1.10 U1.11 U2.1 | length 411.7
  Top Layer w25: J9.5 4112.6,2627.14 4127.24,2612.5 4130.61,2612.5 4137.8,2605.31 R4.1 ; D1.2 v1(7027.56,196.85) ; R5.1 7267.72,850.39 J1.1
Mhs: D2.12 J5.5
Mls: D2.11 J5.4
NetC1_1: C1.1 U1.C_LV_+12 | length 229.1
  Top Layer w50: U1.C_LV_+12 6057.97,516.63 6109.15,516.63 6190.35,597.83 6211.02,597.83 C1.1
NetC2_1: C2.1 C6.1 U1.C_HV | length 2748.9
  Top Layer w50: C2.1@1625.39,530.67 1772.92,530.67 1807.53,496.06 U1.C_HV@1836.61,496.06 ; C6.1 1692.91,2352.36 U1.C_HV@1836.61,2496.06
  Bottom Layer w100: U1.C_HV@1836.61,496.06 1614.17,718.5 1614.17,2273.62 U1.C_HV@1836.61,2496.06
NetC2_2: C2.2 C5.1 F1.2 J8.1 J8.2 U1.2
NetC7_1: C7.1 U1.C_LV_GND | length 201.3
  Top Layer w50: U1.C_LV_GND 6057.97,2475.5 6109.15,2475.5 6170.67,2413.98 6191.34,2413.98 C7.1
NetD1_1: D1.1 R1.2 | length 82.7
  Top Layer w25: R1.2 D1.1
NetD2_15: D2.15 D2.16 J1.2 J4.2 J9.1 R5.2 | length 433.5
  Top Layer w25: R5.2 7113.19,921.26 7120.37,928.44 7120.37,930.24 7135.02,944.88 7389.76,944.88 J1.2
NetD3_13: D3.13 J5.6
NetD3_14: D3.14 J5.7
NetD3_15: D3.15 J5.8
NetJ9_3: J9.3 R3.1 | length 299.7
  Top Layer w25: R3.1 4208.66,2506.89 4215.85,2514.07 4217.09,2514.07 4312.6,2609.59 J9.3
NetJ9_4: J9.4 R4.2 | length 159.1
  Top Layer w25: R4.2 4208.66,2751.97 J9.4
NetQ1_2: Q1.2 R1.1 | length 225.6
  Top Layer w25: R1.1 Q1.2@6736.22,419.69
  Top Layer w50: Q1.2@6734.25,421.65 Q1.2@6736.22,419.69
pads on no net: D2.9 D3.9 D3.10 D3.11 D3.12 J1.3 J3.3 J4.3 J9.2 U1.3 U1.4 U1.13 U1.14 U1.15 U1.16

## Polygon pours and split planes (outlines as drawn)
+12V_Out on Top Layer "+12V_OUT_L01_P007" (solid, pour order 7): 7066.93,1023.62 7854.33,1023.62 7854.33,1791.34 7598.43,1791.34 7559.06,1751.97 7066.93,1751.97
"LV GND" on Top Layer "LV_GND_L01_P008" (solid, pour order 8): 5905.51,1535.43 6181.1,1535.43 6515.75,1870.08 6850.39,1870.08 6850.39,2322.83 5905.51,2322.83
D+12V on Top Layer "D+12V_L01_P006" (solid, pour order 6): 5905.51,669.29 5905.51,1476.38 6279.53,1476.38 6496.06,1692.91 6850.39,1692.91 6850.39,669.29
"HV GND" on Top Layer "HV_GND_L01_P005" (solid, pour order 5): 1968.5,1870.08 708.66,1870.08 708.66,2185.04 1968.5,2185.04
NetC2_2 on Top Layer "NETC2_2_L01_P003" (solid, pour order 3): 708.66,462.6 708.66,1712.6 1968.5,1712.6 1968.5,1496.06 1574.8,1102.36 1574.8,462.6
HV+IN on Top Layer "HV+IN_L01_P004" (solid, pour order 4): 1023.62,393.7 1023.62,39.37 393.7,39.37 393.7,275.59 551.18,275.59 669.29,393.7
"LV GND" on Top Layer "LV_GND_L01_P000" (solid, pour order 0): 8129.92,2421.26 8405.51,2421.26 8405.51,2893.7 8129.92,2893.7
"LV GND" on Bottom Layer "LV_GND_L02_P002" (solid, pour order 2): 2204.72,0 2204.72,2952.76 7874.02,2952.76 7874.02,0
"HV GND" on Bottom Layer "HV_GND_L02_P001" (solid, pour order 1): 0,0 0,2952.76 1968.5,2952.76 1968.5,0

## Keep-outs
Keep-Out Layer:
  lines w10: 0,0 7874.02,0 7874.02,2952.76 0,2952.76 0,0 ; 2047.24,118.11 ccw(c2086.61,118.11) 2125.98,118.11 2125.98,2795.28 ccw(c2086.61,2795.28) 2047.24,2795.28 2047.24,118.11

## Silkscreen, mask and mechanical layers (free items; w line width, h text height)
Mechanical 1:
  lines w10: 2047.24,118.11 ccw(c2086.61,118.11) 2125.98,118.11 2125.98,2795.28 ccw(c2086.61,2795.28) 2047.24,2795.28 2047.24,118.11
  lines w20: 0,0 7874.02,0 7874.02,2952.76 0,2952.76 0,0